# Altium PCB Copy of Drivers.PcbDoc
Units mil, origin at the board's own origin, x right, y up, seen from the top; angles counter-clockwise.
Board outline 1620 x 2040 mil, 2 copper layers (Top Layer, Bottom Layer); 23 components, 23 nets, 93 pads, 44 vias.
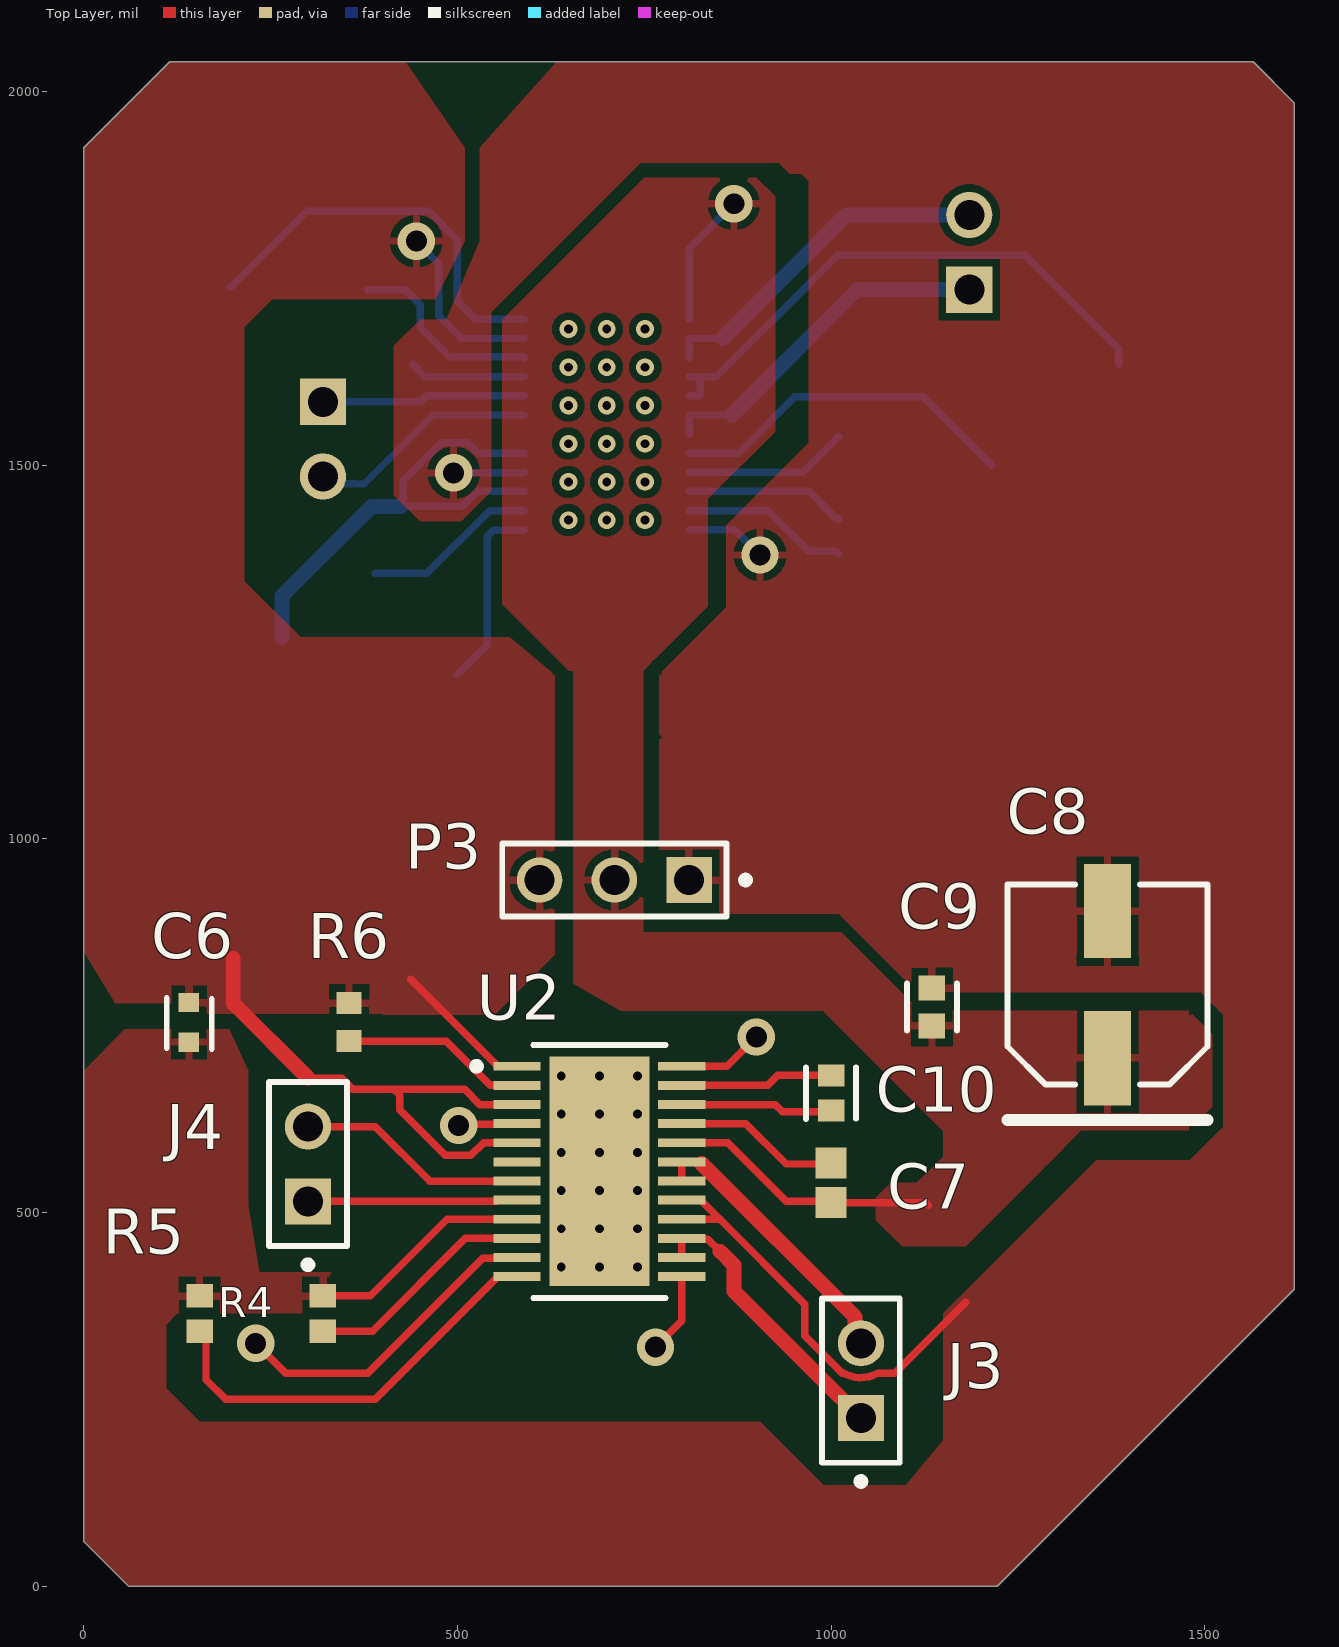
[diagram p0: Top Layer view]
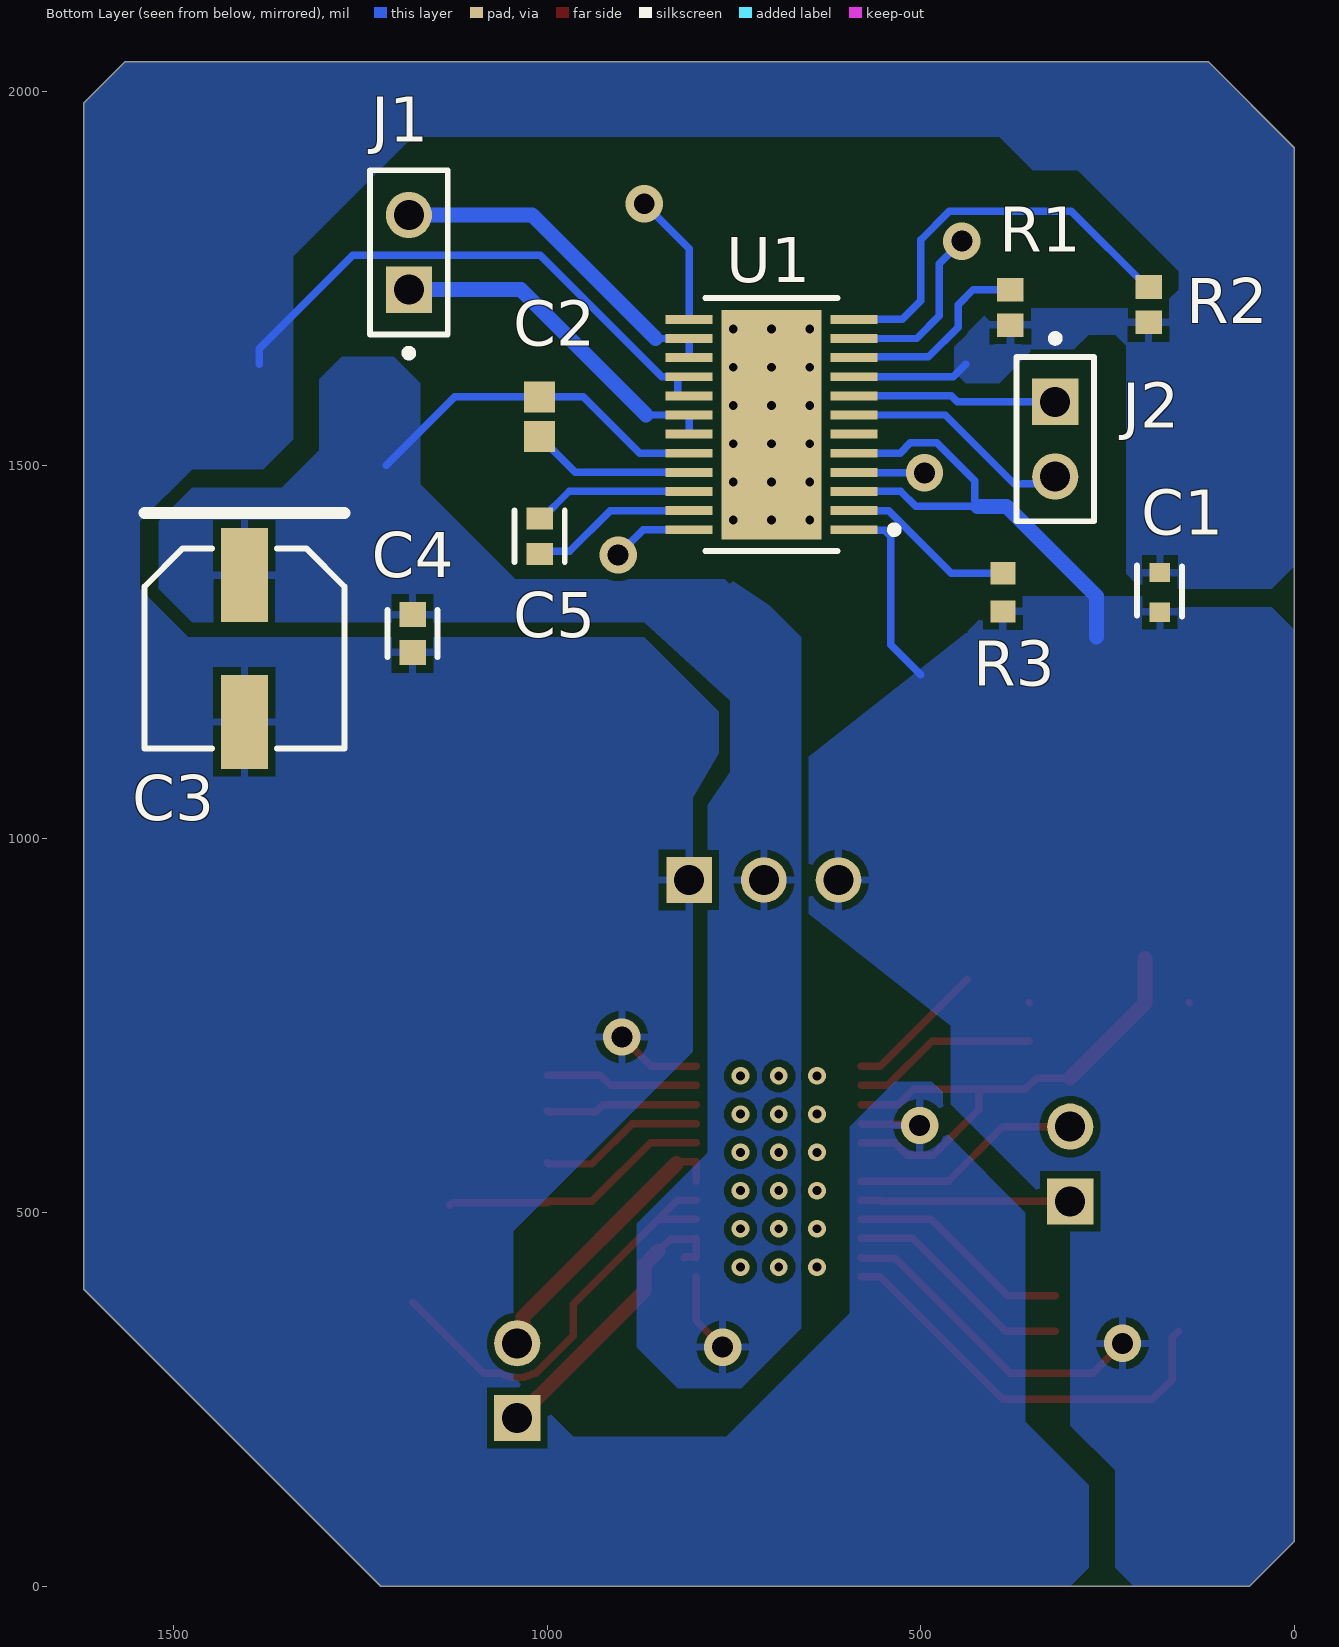
[diagram p1: Bottom Layer view, seen from below]

## Layer stack, top to bottom
Top Solder: solder mask 0.4, Solder Resist, Dk 3.5
Top Layer: signal copper 1.4
Dielectric 1: dielectric 12.6, FR-4, Dk 4.8
Bottom Layer: signal copper 1.4
Bottom Solder: solder mask 0.4, Solder Resist, Dk 3.5

## Board outline
60,0 0,60 0,1925 115,2040 1565,2040 1620,1985 1620,397.5 1222.5,0

## Design rules (kind name [scope] priority, off if disabled: settings)
Clearance [All] p1: gap=10 ignorepadtopadclearanceinfootprint=FALSE except(0: Arc-Hole Track-Hole SMDPad-Hole THPad-Hole Via-Hole Fill-Hole Poly-Hole Region-Hole Text-Hole)
PolygonConnect [All] p1: connectstyle=Relief reliefconductorwidth=10 reliefentries=4 polygonreliefangle="90 Angle" airgapwidth=10
RoutingVias [All] p1: holewidth=28 width=50 viastyle="Through Hole" minholewidth=28 minwidth=50 maxholewidth=28 maxwidth=50
SolderMaskExpansion [All] p1: expansion=4 istentingtop=FALSE
Width [All] p1: maxlimit=20 minlimit=10 preferedwidth=10
30 further rules are at their usual default settings.

## Components (designator, comment, footprint, x,y, rotation, side; value= is the part's Value field where it differs from the comment)
C1 "1uF, 6.3V" FP-GRM188-0_1-MFG 180,1330 r270 bottom
C2 "1uF 50V" CAPC1608X90X35ML10T25 1010,1565 r270 bottom
C3 "47uF 35V" PNSC-FP-V-D_V 1405,1255 r270 bottom
C4 "0.1uF 50V" FP-C0603-CJ-MFG 1180,1275 r270 bottom value=100nF
C5 "47nF, 50V" FP-C0603C-CF-MFG 1010,1405 r90 bottom value="47,000 pF"
C6 "1uF, 6.3V" FP-GRM188-0_1-MFG 140.49,754.51 r90 top
C7 "1uF 50V" CAPC1608X90X35ML10T25 1000,540 r90 top
C8 "47uF 35V" PNSC-FP-V-D_V 1370,805 r90 top
C9 "0.1uF 50V" FP-C0603-CJ-MFG 1135,775 r90 top value=100nF
C10 "47nF, 50V" FP-C0603C-CF-MFG 1000,660 r270 top value="47,000 pF"
J1 "M20-9990246" FP-M20-9990246-MFG 1185,1785 r90 bottom
J2 "M20-9990246" FP-M20-9990246-MFG 320,1535 r270 bottom
J3 "M20-9990246" FP-M20-9990246-MFG 1040,275 r90 top
J4 "M20-9990246" FP-M20-9990246-MFG 300,565 r90 top
P3 "22-28-4033" MOLX-22-28-4033_V 710,945 r180 top
R1 "1K, 0.1W" RESC1608X55X30LL20T20 380,1711.38 r90 bottom
R2 "1K, 0.1W" RESC1608X55X30LL20T20 195,1715 r90 bottom
R3 "10kOhm" RESC1609X55X30LL15T15 390,1330 r90 bottom
R4 "1K, 0.1W" RESC1608X55X30LL20T20 320,365 r270 top
R5 "1K, 0.1W" RESC1608X55X30LL20T20 155,365 r270 top
R6 "10kOhm" RESC1609X55X30LL15T15 355,755 r270 top
U1 "DRV8873HPWPRQ1" FP-PWP0024J-MFG 699.76,1554.57 r0 bottom
U2 "DRV8873HPWPRQ1" FP-PWP0024J-MFG 690,555 r0 top

## Footprints (in the part's own frame and the unit in brackets; to place one, negate y for a bottom-side part, rotate by r counter-clockwise, add the part's x,y. Pads: shape width x height; smd on the part's side, far side on the other; paste and mask are expansions set on the pad)
CAPC1608X90X35ML10T25 [mm] "Chip Capacitor, 2-Leads, Body 1.70x0.90mm, IPC Low Density"
  rect 1.05x1.05 smd: 1(-0.675,0) 2(0.675,0)
  body extent -0.85,-0.45 0.85,0.45, height 0.9
FP-C0603-CJ-MFG [mm]
  rect 0.85x0.9 smd paste+0 mask+0: 1(-0.65,0) 2(0.65,0)
  silkscreen extent -0.8,-0.85 0.8,0.85, body extent -0.8,-0.4 0.8,0.4, height 0.95
FP-C0603C-CF-MFG [mm]
  rect 0.75x0.9 smd paste+0 mask+0: 1(-0.6,0) 2(0.6,0)
  silkscreen extent -0.87,-0.85 0.88,0.85, body extent -0.8,-0.4 0.8,0.4, height 0.87
FP-GRM188-0_1-MFG [mm]
  rect 0.65x0.7 smd paste+0 mask+0: 1(-0.675,0) 2(0.675,0)
  silkscreen extent -0.91,-0.78 0.82,0.75, body extent -0.8,-0.4 0.8,0.4, height 0.9
FP-M20-9990246-MFG [mm]
  rect 1.57x1.57 hole 1.02 paste-1000 mask+0: 1(-1.27,0)
  round 1.57 hole 1.02 paste-1000 mask+0: 2(1.27,0)
  silkscreen extent -3.55,-1.32 2.79,1.32, body extent -2.54,-1.27 2.54,1.27, height 8.99
FP-PWP0024J-MFG [mm]
  rect 1.6x0.3 smd paste-1000 mask+0: 1(-2.8,3.575) 2(-2.8,2.925) 3(-2.8,2.275) 4(-2.8,1.625) 5(-2.8,0.975) 6(-2.8,0.325) 7(-2.8,-0.325) 8(-2.8,-0.975) 9(-2.8,-1.625) 10(-2.8,-2.275) 11(-2.8,-2.925) 12(-2.8,-3.575) 13(2.8,-3.575) 14(2.8,-2.925) 15(2.8,-2.275) 16(2.8,-1.625) 17(2.8,-0.975) 18(2.8,-0.325) 19(2.8,0.325) 20(2.8,0.975) 21(2.8,1.625) 22(2.8,2.275) 23(2.8,2.925) 24(2.8,3.575)
  rect 3.4x7.8 smd paste-1000 mask-1000: 25(0,0)
  silkscreen extent -4.3,-4.3 2.25,4.3, body extent -3.2,-3.9 3.2,3.9, height 1.2
MOLX-22-28-4033_V [mm] "THD, 3-Leads, Body 7.62x2.49mm, Pitch 2.54mm"
  rect 1.55x1.55 hole 1.02: 1(-2.54,0)
  round 1.55 hole 1.02: 2(0,0) 3(2.54,0)
  silkscreen extent -4.59,-1.24 3.81,1.24, body extent -3.81,-1.24 3.81,1.24, height 8.38
PNSC-FP-V-D_V [mm] "CAPAE, 2-Leads, Body 6.80x6.80mm"
  rect 3.2x1.6 smd: 1(-2.5,0) 2(2.5,0)
  silkscreen extent -4.6,-3.4 3.4,3.4, body extent -3.9,-3.4 3.9,3.4, height 6.1
RESC1608X55X30LL20T20 [mm] "Chip Resistor, 2-Leads, Body 1.60x0.80mm, IPC High Density"
  rect 0.8x0.9 smd: 1(-0.6,0) 2(0.6,0)
  body extent -0.9,-0.5 0.9,0.5, height 0.55
RESC1609X55X30LL15T15 [mm] "Chip Resistor, 2-Leads, Body 1.75x0.95mm, IPC High Density"
  rect 0.75x0.85 smd: 1(-0.65,0) 2(0.65,0)
  body extent -0.87,-0.48 0.87,0.48, height 0.55

## Part data
C1 C6: library part CMP-2006-02790-2, "CAP CER 1UF 6.3V X5R 0603", Capacitance=1uF, Case Code (Imperial)=0603, Case Code (Metric)=1608, Dielectric=X5R, Dielectric Material=Ceramic, Insulation Resistance=500MR, Max Operating Temperature=85°C, Min Operating Temperature=-55°C, Package Quantity=1, Tolerance=10%, Voltage=6.3V, Case/Package=0603, Depth=0.8mm, Height=0.8mm, Lead Free="Lead Free", Length=1.6mm, Mount="Surface Mount", Packaging="Tape and Reel", Radiation Hardening=No, REACH SVHC="No SVHC", Termination=SMD/SMT, Thickness=0.035inch, Voltage Rating=6.3V, Voltage Rating (DC)=6.3V, Width=0.031inch
C2 C7: library part CMP-2000-05447-1, "Chip Capacitor, 1 uF, +/- 10%, 50 V, -55 to 85 degC, 0603 (1608 Metric), RoHS, Tape and Reel", Capacitance=1µF, Manufacturer="Taiyo Yuden", Operating Temperature=-55degC~85degC, Package / Case=0603(1608Metric), Package Description="2-Pin Surface Mount Device, Body 1.6 x 0.8 mm", Package Reference=603, Ratings=-, Standard Package=1, Temperature Coefficient=X5R, Tolerance=±10%, Voltage - Rated=50V, Applications=GeneralPurpose, Catalog Drawings=xMKSeries_0603_0.8, Category=Capacitors, Datasheet URL=https://datasheet.ciiva.com/15922/336umk107bj105ka-t-15922611.pdf, Datasheet Version=Mar-13, Family=CeramicCapacitors, Features=-, Height - Seated (Max)=-, Lead Spacing=-, Lead Style=-, Manufacturer URL=http://www.t-yuden.com/, Mounting Type=SurfaceMount,MLCC, Online Catalog=MSeries, Other Names=587-2400-6, Packaging=Digi-Reel, Series=M, Size / Dimension="0.063\"Lx0.031\"W(1.60mmx0.80mm)", Thickness (Max)="0.035\"(0.90mm)"
C3 C8: library part CMP-2000-06216-1, "Aluminum Electrolytic Capacitor, 47 uF, +/- 20%, 35 V, 2-Pin SMD (Size Code D), -55 to 105 degC, RoHS, Tape and Reel", Capacitance=47µF, Case Size/Dimension=Ø6.3x5.8mm, ESR (Equivalent Series Resistance)=0.26O, Lifetime@Temperature=2000Hrs@105°C, Manufacturer=Panasonic, Operating Temp Range=-55to+105°C, Operating Temp-Max=105°C, Package Description="2-Pin Electrolytic Aluminum Capacitor, Body 6.6 x 6.6 mm", Package Reference=FP-V-D, Rated Voltage=35V, Ripple Current=300mA, Datasheet URL=http://industrial.panasonic.com/cdbs/www-data/pdf/RDE0000/ABA0000C1184.pdf, Datasheet Version=03/2016, Manufacturer URL=http://www.panasonic.com/, Mounting Technology=SurfaceMount, Package URL=http://industrial.panasonic.com/cdbs/www-data/pdf/RDE0000/DME0000COL48.pdf, Series=FP, Type=Can
C4 C9: library part CMP-2006-03300-2, "CAP CER 0.1UF 50V X7R 0603", Capacitance=100nF, Manufacturer=Kemet, Manufacturer Part Number=C0603X104K5RACTU, Package=C0603-CJ, Temperature="-55°C to +125°C", Temperature Characteristic=X7R, Temperature Coefficient=15%, Temperature Range High=+125°C, Temperature Range Low=-55°C, Tolerance=10%, Voltage=50V, Automotive=No, Category=Cap, ComponentLink2Description=Datasheet, ComponentLink2URL=https://content.kemet.com/datasheets/KEM_C1013_X7R_FT-CAP_SMD.pdf, Device Class L1="Passive Components", Device Class L2=Capacitors, Device Class L3="Ceramic Capacitors", Digikey Description="CAP CER 0.1UF 50V X7R 0603", Height=0.95mm, Ipc Land Pattern Name=CAPC16080X80, Lead Free=Yes, Material=Ceramic, Mouser Description="Capacitor; Ceramic; Cap 0.1uF; Tol+10%; SMT; Flexible Termination; Vol-Rtg 50V; TR", Octopart=https://octopart.com/c0603x104k5ractu-kemet-9145062, RoHS=TRUE, Voltage Rating=50V
C5 C10: library part CMP-2006-03232-2, "CAP CER 0.047UF 50V 10% X7R 0603", Capacitance="47,000 pF", Manufacturer=KEMET, Manufacturer Part Number=C0603C473K5RACTU, Package=C0603C-CF, Temperature="-55°C to +125°C", Temperature Characteristic=X7R, Temperature Coefficient=30ppm/°C, Temperature Range High=+125°C, Temperature Range Low=-55°C, Tolerance=0.1, Voltage Rating="50 V", Automotive=Yes, Automotive Grade="Grade 1", Category=Cap, ComponentLink2Description=Datasheet, ComponentLink2URL=https://api.kemet.com/component-edge/download/datasheet/C0603C100J5GACAUTO.pdf, Device Class L1="Passive Components", Device Class L2=Capacitors, Device Class L3="Ceramic Capacitors", Digikey Description="CAP CER 0.047UF 50V 10% X7R 0603", Height=0.87mm, Lead Free=Yes, Material=Ceramic, Mouser Description="Multilayer Ceramic Capacitors MLCC - SMD/SMT 50volts 47000pF X7R 10%", Octopart=https://octopart.com/c0603c473k5ractu-kemet-9138594, RoHS=TRUE
J1 J2 J3 J4: library part CMP-15831-000009-1, "CONN HEADER VERT 2POS 2.54MM", Current Rating=3A, Manufacturer=Harwin, Temperature="-40°C to +105°C", Temperature Range High=+105°C, Temperature Range Low=-40°C, Automotive=No, Category=Conn, ComponentLink2Description=Datasheet, ComponentLink2URL=https://cdn.harwin.com/pdfs/M20-999.pdf, Conn Gender=Male, Conn Orientation=Vertical, Contact Material=Tin,Nickel, Device Class L1=Connectors, Device Class L2="Headers and Wire Housings", Device Class L3=unset, Digikey Description="CONN HEADER VERT 2POS 2.54MM", Height=8.99mm, Lead Free=Yes, Manufacturer Part Number=M20-9990246, Mouser Description="2.54mm (0.1\") Pitch SIL Vertical PC Tail Pin Header, 6.1mm mating pin height, tin, 2 contacts", Number Of Contacts=2, Number Of Rows=1, Octopart=https://octopart.com/m20-9990246-harwin-2590635, Package=M20-9990246, Pitch=2.54mm, RoHS=TRUE
P3: library part CMP-1676-00001-5, "Male Header, Pitch 2.54 mm, 1 x 3 Position, Height 8.38 mm, Tail Length 3.18 mm, RoHS, Bulk", Colour=Black, Current Rating="4 A", Manufacturer=Molex, Max Operating Temperature="75 degC", Min Operating Temperature="0 degC", Package Quantity=1, Voltage Rating="250 V", ComponentLink1Description="Manufacturer URL", ComponentLink1URL=http://www.molex.com/, ComponentLink2Description=Datasheet, ComponentLink2URL=http://www.molex.com/pdm_docs/sd/022284033_sd.pdf, Contact Finish=Gold, Contact Material=Brass, Contact Plating=Gold, DatasheetVersion="Rev. G, 01/2012", Height="8.38 mm", Lead Pitch="0.1 inch", Length="7.62 mm", Mount="Through Hole", Mounting Technology="Through Hole", PackageDescription="Male Header, Pitch 2.54 mm, 1 x 3 Position, Height 8.38 mm, Tail Length 3.18 mm", PackageReference=22-28-4033, Packaging=Bulk, Pins=3, REACH SVHC=Unknown, RoHSCompliant=true, Rows=1
R1 R2 R4 R5: library part CMP-2000-00873-1, Manufacturer=Panasonic, Part Number=ERA3AEB102V
R3 R6: library part CMP-1012-00623-3, "Chip Resistor, 10 KOhm, +/- 1%, 0.1 W, -55 to 155 degC, 0603 (1608 Metric), RoHS, Tape and Reel", Case Code (Imperial)=0603, Case Code (Metric)=1608, Manufacturer=Panasonic, Max Operating Temperature=155degC, Max Power Dissipation=100mW, Min Operating Temperature=-55degC, Package Description="2-Pin Surface Mount Device, Body 1.6 x 0.85 mm", Package Quantity=1, Package Reference=603, Resistance=10KOhm, Temperature Coefficient=100ppm\/degreesC, Tolerance=1%, Voltage Rating=75V, Case\/Package=0603, Composition=ThickFilm, Contact Plating=Tin, Datasheet URL=https://industrial.panasonic.com/cdbs/www-data/pdf/RDA0000/AOA0000C304.pdf, Datasheet Version=02/2017, Depth=0.8mm, Height=0.45mm, Lead Free=LeadFree, Length=1.6mm, Manufacturer URL=http://www.panasonic.com/, Military Standard=Not, Mount=SurfaceMount, Mounting Technology=SurfaceMount, Number of Pins=2, Number of Terminations=2, Packaging=TapeandReel, Power Rating=100mW, Radiation Hardening=No, REACH SVHC=NoSVHC, RoHSCompliant=true, Termination=SMD/SMT, Voltage Rating (DC)=75V, Width=0.031inch
U1 U2: library part CMP-04915-000006-1, "IC MTRDRV UNIPLR 0-5.5V 24HTSSOP", Ambient Temperature Range High=+125°C, Ambient Temperature Range Low=-40°C, Manufacturer="Texas Instruments", Max Junction Temp=+150°C, Max Supply Voltage=38V, Min Supply Voltage=4.5V, Nominal Supply Current=5mA, Output Current=10A, Package=PWP0024J, Switching Frequency=400kHz, Temperature="-40°C to +125°C", Automotive=Yes, Automotive Grade="Grade 1", Category=IC, ComponentLink2Description=Datasheet, ComponentLink2URL=http://www.ti.com/lit/ds/symlink/drv8873-q1.pdf, Device Class L1="Integrated Circuits (ICs)", Device Class L2="Power Management ICs", Device Class L3="Motor Drivers", Digikey Description="IC MTRDRV UNIPLR 0-5.5V 24HTSSOP", Height=1.2mm, Ipc Land Pattern Name=SOP65P640X120-24, Lead Free=Yes, Manufacturer Part Number=DRV8873HPWPRQ1, Motor Type=Brushed, Mouser Description="Automotive H-Bridge Motor Driver 24-HTSSOP -40 to 125", Number Of Outputs=2, Octopart=https://octopart.com/drv8873hpwprq1-texas+instruments-94502234, RoHS=TRUE, Standoff Height=0.05mm, Temperature Range High=+125°C, Temperature Range Low=-40°C

## Via types
v1: diameter 23.62, hole 11.81, Top Layer to Bottom Layer, 36 vias
v2: diameter 50, hole 28, Top Layer to Bottom Layer, 8 vias

## Nets (pads, with @x,y where several pads share a name; then routed paths per layer and width w, separated by ;. In a path a pad name is that pad's centre, name@x,y a point inside that pad or via, vN(x,y) a via of type N, cw(c..) or ccw(c..) an arc to the next point about the centre after c; other vN are vias at no path point)
+5: C1.2 C6.2 P3.3 R3.1 R6.1 U1.1 U1.3 U1.5 U1.11 U2.1 U2.3 U2.5 U2.11 | length 2494.7
  Top Layer w10: C6.2 C6.2@140.98,780.59 ; v2(230,325) 270,285 380,285 533.94,438.94 578.86,438.94 U2.11 ; 300,680 345,680 360,665 415,665 ; R6.1@354.51,781.08 R6.1 ; 437.46,812.46 554.17,695.75 U2.1 ; U2.5 534.95,593.39 518.1,576.54 483.46,576.54 422.65,637.35 422.65,657.35 415,665 ; U2.3 530.07,644.57 509.64,665 415,665
  Top Layer w20: 200,840 200,780 300,680
  Bottom Layer w10: 420,1448.83 423.83,1448.83 427.65,1452.65 427.65,1479.22 478.43,1530 513.82,1530 527.64,1516.18 U1.5 ; 423.83,1445 506.57,1445 526.57,1465 U1.3 ; v2(445,1800) 475,1770 475,1700 505.28,1669.72 U1.11 ; 500,1220 540,1260 540,1405 547.91,1412.91 588.62,1412.91 U1.1
  Bottom Layer w20: 265,1270 265,1325 385,1445 423.83,1445
GND: C1.1 C3.2 C4.2 C6.1 C8.2 C9.2 P3.1 R1.1 R2.1 R4.1 R5.1 U1.4 U1.9 U1.16 U1.17 U1.24 U2.4 U2.9 U2.16 U2.17 U2.24 | length 2206
  Top Layer w10: R4.1 383.62,388.62 486.02,491.02 U2.9 ; v2(501.54,616.54) 503.07,618.07 578.86,618.07 U2.4 ; U2.16 851.42,491.02 ; U2.17 825.83,516.61 851.42,491.02 ; U2.24 860.75,695.75 v2(900,735) ; 1180,380 1085,285 1062.52,285 cw(c1040,325) 1019.45,283.95 ccw(c1014.99,275) 1015.08,285 992.99,307.09 965,335.08 965,377.44 851.42,491.02
  Bottom Layer w10: 440,1635 456.46,1618.54 U1.9 ; v2(495,1490) 495.3,1490.3 589.23,1490.3 U1.4 ; U1.24 871.18,1413.82 v2(905,1380) ; U1.17 824.14,1592.95 825.05,1593.86 825.05,1617.64 U1.16@825.95,1618.54 ; U1.16 U1.16@825.95,1618.54 ; 1385,1635 1385,1655.91 1260,1780.91 1008.96,1780.91 846.59,1618.54 U1.16@825.95,1618.54
NetC2_2: C2.2 U1.21 | length 219.8
  Bottom Layer w10: U1.21 962.17,1490.59 C2.2
NetC5_1: C5.1 U1.23 | length 224
  Bottom Layer w10: U1.23 915.59,1439.41 970,1385 1006.38,1385 C5.1
NetC5_2: C5.2 U1.22 | length 215.1
  Bottom Layer w10: U1.22 970.67,1465 1007.05,1428.62 C5.2
NetC7_2: C7.2 U2.21 | length 222.8
  Top Layer w10: U2.21 886.02,618.98 940,565 998.43,565 C7.2
NetC10_1: C10.1 U2.23 | length 205.3
  Top Layer w10: U2.23 915.16,670.16 928.62,683.62 C10.1
NetC10_2: C10.2 U2.22 | length 204.3
  Top Layer w10: U2.22 925.43,644.57 935,635 998.62,635 C10.2
NetJ1_1: J1.1 U1.18 U1.19 | length 470
  Bottom Layer w10: U1.19 U1.18 867.36,1567.36
  Bottom Layer w20: 867.36,1567.36 1035,1735 J1.1
NetJ1_2: J1.2 U1.14 U1.15 | length 469
  Bottom Layer w10: U1.15 U1.14 854.72,1669.72
  Bottom Layer w20: 854.72,1669.72 1020,1835 J1.2
NetJ2_1: J2.1 U1.8 | length 272.8
  Bottom Layer w10: J2.1 450.94,1585 458.9,1592.95 U1.8
NetJ2_2: J2.2 U1.7 | length 311.9
  Bottom Layer w10: J2.2 329.91,1475.09 363.93,1475.09 364.02,1475 375,1475 467.36,1567.36 U1.7
NetJ3_1: J3.1 U2.14 U2.15 | length 402.1
  Top Layer w10: U2.14@816.19,439.84 815.28,440.75 801.14,440.75 U2.14 U2.15 801.14,464.53 835.12,464.53 851.6,448.04
  Top Layer w20: 851.6,448.04 870,429.64 870,394.72 1010.63,254.09 1010.91,254.09 J3.1
NetJ3_2: J3.2 U2.18 U2.19 | length 382.7
  Top Layer w10: U2.18 U2.19 825.83,567.8 826.73,566.89 U2.19@826.73,565.76
  Top Layer w20: U2.19@826.73,565.76 1032,360.49 1032,333 J3.2
NetJ4_1: J4.1 U2.8 | length 280.4
  Top Layer w10: J4.1 552.56,515 554.17,516.61 U2.8
NetJ4_2: J4.2 U2.7 | length 309.9
  Top Layer w10: J4.2 390,615 462.8,542.2 U2.7
NetR1_2: R1.2 U1.10 | length 264.7
  Bottom Layer w10: R1.2 430,1735 450,1715 450,1685 490,1645 588.66,1645 U1.10
NetR2_2: R2.2 U1.12 | length 544.2
  Bottom Layer w10: R2.2 196.97,1738.62 298.35,1840 461.57,1840 500,1801.57 500,1720 524.69,1695.31 U1.12
NetR3_2: R3.2 U1.2 | length 234.2
  Bottom Layer w10: R3.2 459.21,1355.59 543.03,1439.41 U1.2
NetR4_2: R4.2 U2.10 | length 311.1
  Top Layer w10: R4.2 386.38,341.38 510.43,465.43 U2.10
NetR5_2: R5.2 U2.12 | length 563.7
  Top Layer w10: R5.2 163.51,332.87 163.51,276.49 190,250 389.96,250 ; 389.96,250.04 554.17,414.25 U2.12
NetR6_2: R6.2 U2.2 | length 249.3
  Top Layer w10: R6.2 484.92,729.41 544.17,670.16 U2.2
VBat: C2.1 C3.1 C4.1 C7.1 C8.1 C9.1 P3.2 U1.13 U1.20 U2.13 U2.20 | length 1126.8
  Top Layer w10: v2(765,320) 800.24,355.24 U2.13 ; U2.20 861.61,593.39 940,515 998.43,515 C7.1 1126.57,513.43 1130,510
  Bottom Layer w10: U1.20 876.18,1516.18 951.57,1591.57 C2.1 1123.43,1591.57 1215,1500 ; U1.13 810,1790 v2(870,1850)
pads on no net: U1.6 U1.25 U2.6 U2.25
copper on no net:
  other v1: 638.82,427.05 690,427.05 741.18,427.05 638.82,478.23 690,478.23 741.18,478.23 638.82,529.41 690,529.41 741.18,529.41 638.82,580.59 690,580.59 741.18,580.59 638.82,631.77 690,631.77 741.18,631.77 638.82,682.95 690,682.95 741.18,682.95 648.58,1426.61 699.76,1426.61 750.94,1426.61 648.58,1477.8 699.76,1477.8 750.94,1477.8 648.58,1528.98 699.76,1528.98 750.94,1528.98 648.58,1580.16 699.76,1580.16 750.94,1580.16 648.58,1631.34 699.76,1631.34 750.94,1631.34 648.58,1682.52 699.76,1682.52 750.94,1682.52

## Polygon pours and split planes (outlines as drawn)
GND on Top Layer "GND_L01_P007" (solid, pour order 7): 805,1240 1620,1240 1620,397.5 1222.5,0 60,0 0,60 0,690 55,745 194.72,745 220,690 220,510 235,420 335,420 350,405 350,380 335,365 125,365 110,350 110,265 155,220 905,220 990,135 1100,135 1150,195 1150,365 1355,570 1525,570 1525,795 1620,795 1480,795 1430,845 1150,845 805,1190
GND on Top Layer "GND_L01_P035" (solid, pour order 35): 1535,740 1535,755 1460,830 1480,850 1545,850
GND on Top Layer "GND_L01_P034" (solid, pour order 34): 1480,570 1545,635 1555,635 1555,535 1550,530 1495,530
+5 on Top Layer "+5_L01_P017" (solid, pour order 17): 630,1220 570,1270 290,1270 215,1345 215,1685 252.5,1722.5 470,1722.5 510,1800 510,1925 430,2040 115,2040 0,1925 0,850 41.79,780 142.95,780
+5 on Top Layer "+5_L01_P003" (solid, pour order 3): 630,1050.73 630,845 550,765 400,765 400,810 410,820
+5 on Top Layer "+5_L01_P002" (solid, pour order 2): 630,1220 630,993.75 402.5,766.25 127.5,766.25 127.5,826.25 450,1148.75 450,1220
GND on Top Layer "GND_L01_P033" (solid, pour order 33): 1565,2040 1620,1985 1620,1210 1580,1210 1570,1200 1475,1295 1475,1845 1290,2030
GND on Top Layer "GND_L01_P027" (solid, pour order 27): 1065,2040 1565,2040 1620,1135 1095,1135 1060,1100 1020,1140 1020,1325
GND on Top Layer "GND_L01_P024" (solid, pour order 24): 770,1220 860,1310 860,1420 970,1530 970,1880 960,1890 945,1890 930,1905 745,1905 545,1705 545,1465 505,1425 450,1425 415,1460 415,1660 450,1695 485,1695 530,1800 530,1925 632.86,2040 1065,2040 1120,1965 1120,1150 1155,1115
VBat on Top Layer "VBAT_L01_P028" (solid, pour order 28): 760,1236.22 835,1311.22 835,1455 925,1545 925,1805 915,1815 700,1815 700,1657.72 630,1587.72 630,1390
GND on Top Layer "GND_L01_P025" (solid, pour order 25): 770,1140 770,920 790,900 1020,900
VBat on Top Layer "VBAT_L01_P023" (solid, pour order 23): 648.78,1225 560,1313.78 560,1695 750,1885 900,1885 925,1860 925,1805 875,1755 810,1755 760,1705 760,1236.22 748.78,1225
VBat on Top Layer "VBAT_L01_P019" (solid, pour order 19): 1478.78,610 1508.78,640 1510,640 1510,738.78 1478.78,770
VBat on Top Layer "VBAT_L01_P018" (solid, pour order 18): 1285,560 1335,610 1280,665 1215,665
GND on Top Layer "GND_L01_P006" (solid, pour order 6): 770,1220 770,1140 1120,790 1125,795 1480,795 1540,855 1540,935 1455,1020 1055,1020 875,1200 875,1220
VBat on Top Layer "VBAT_L01_P005" (solid, pour order 5): 1150,610 1150,575 1115,540 1080,540 1060,520 1060,490 1095,455 1180,455 1285,560 1285,640
VBat on Top Layer "VBAT_L01_P004" (solid, pour order 4): 748.78,1225 655,1225 655,806.44 718.78,770 988.78,770 1148.78,610 1478.78,610 1478.78,770 1118.78,770 1013.78,875 748.78,875 748.78,1140
GND on Bottom Layer "GND_L02_P022" (solid, pour order 22): 205,1335 225,1355 225,1660 240,1675 275,1675 295,1655 405,1655 415,1665 415,1700 405,1710 180,1710 155,1735 155,1760 290,1895 350,1895 395,1940 1180,1940 1340,1780 1340,1535 1380,1495 1475,1495 1545,1425 1545,1335 1470,1260 1470,545 1580,545 1620,729.27 1620,1985 1565,2040 115,2040 0,1925 0,1365 30,1335
+5 on Bottom Layer "+5_L02_P032" (solid, pour order 32): 145,1310 30,1310 0,1280 0,60 60,0 215,0 240,25 240,155 300,215 300,375 210,465 275,530 275,1180
GND on Bottom Layer "GND_L02_P029" (solid, pour order 29): 1620,735 1620,397.5 1222.5,0 1260,450 1265,455
GND on Bottom Layer "GND_L02_P030" (solid, pour order 30): 470,610 360,500 360,220 275,135 275,25 300,0 655,0 655,80 640,95
GND on Bottom Layer "GND_L02_P011" (solid, pour order 11): 870,1270 770,1170 770,1115 805,1055 805,715 1045,475 1045,275 1040,275 965,200 760,200 595,365 595,615 535,675 485,675 470,660 470,115 585,0 1222.5,0 1470,247.5 1470,1225 1530,1270
GND on Bottom Layer "GND_L02_P026" (solid, pour order 26): 350,1655 395,1610 440,1610 455,1625 455,1660 415,1700 395,1680 395,1675
+5 on Bottom Layer "+5_L02_P020" (solid, pour order 20): 440,1275 415,1300 415,1325 165,1325 130,1290 130,1065 145,1050
+5 on Bottom Layer "+5_L02_P009" (solid, pour order 9): 460,660 460,645 300,485 300,315 250,265 185,265 145,305 145,1145 275,1275 385,1165 385,830
+5 on Bottom Layer "+5_L02_P008" (solid, pour order 8): 650,1110 650,900 460,750 460,660 425,625 385,625 275,735 275,1275 440,1275
VBat on Bottom Layer "VBAT_L02_P014" (solid, pour order 14): 1170,1425 1170,1610 1205,1645 1275,1645 1305,1615 1305,1520 1365,1460
VBat on Bottom Layer "VBAT_L02_P013" (solid, pour order 13): 665,1250 762.5,1347.5 1042.5,1347.5 1170,1475 1175,1470 1475,1470 1520,1425 1520,1335 1475,1290 1215,1290 1195,1290 870,1290 755,1185
VBat on Bottom Layer "VBAT_L02_P010" (solid, pour order 10): 660,1270 660,1210 660,345 740,265 825,265 880,320 880,485 785,580 785,1045 755,1090 755,1347.5 702.5,1312.5